# Allegro board ADUINO_UNO.brd
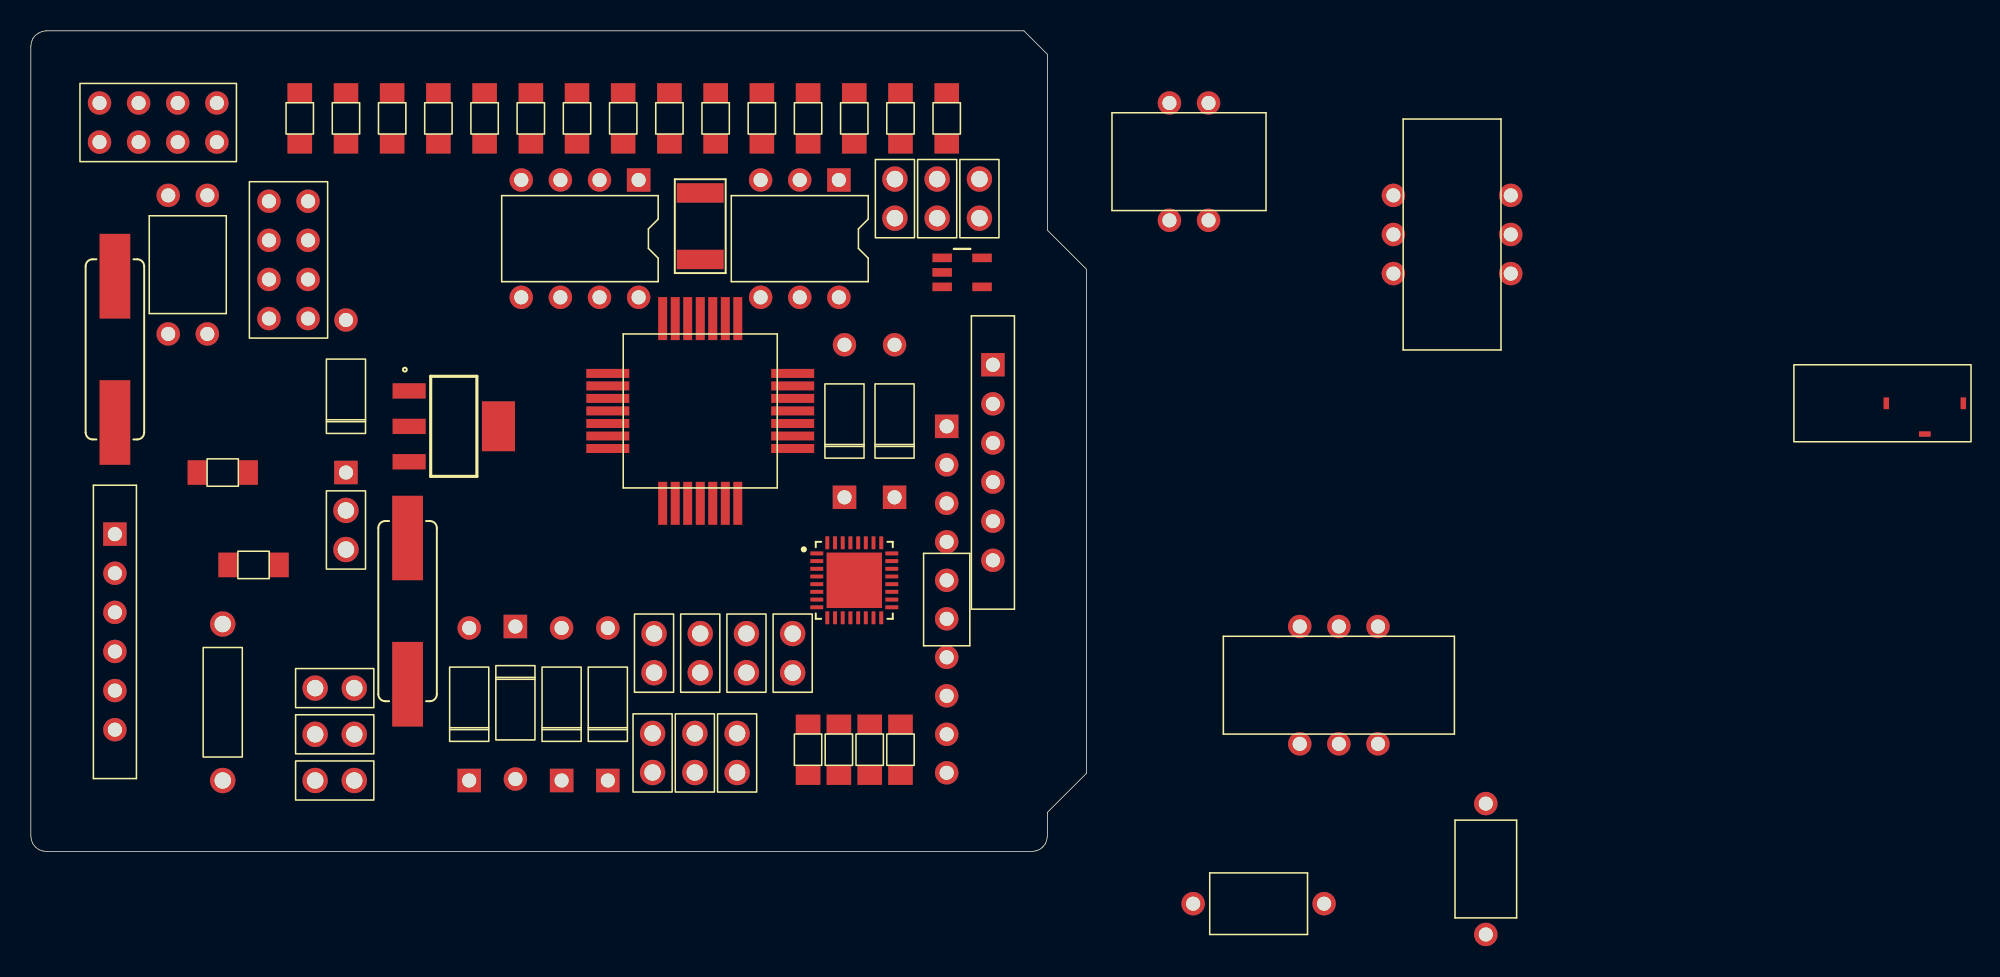
[diagram p0: board, top side]
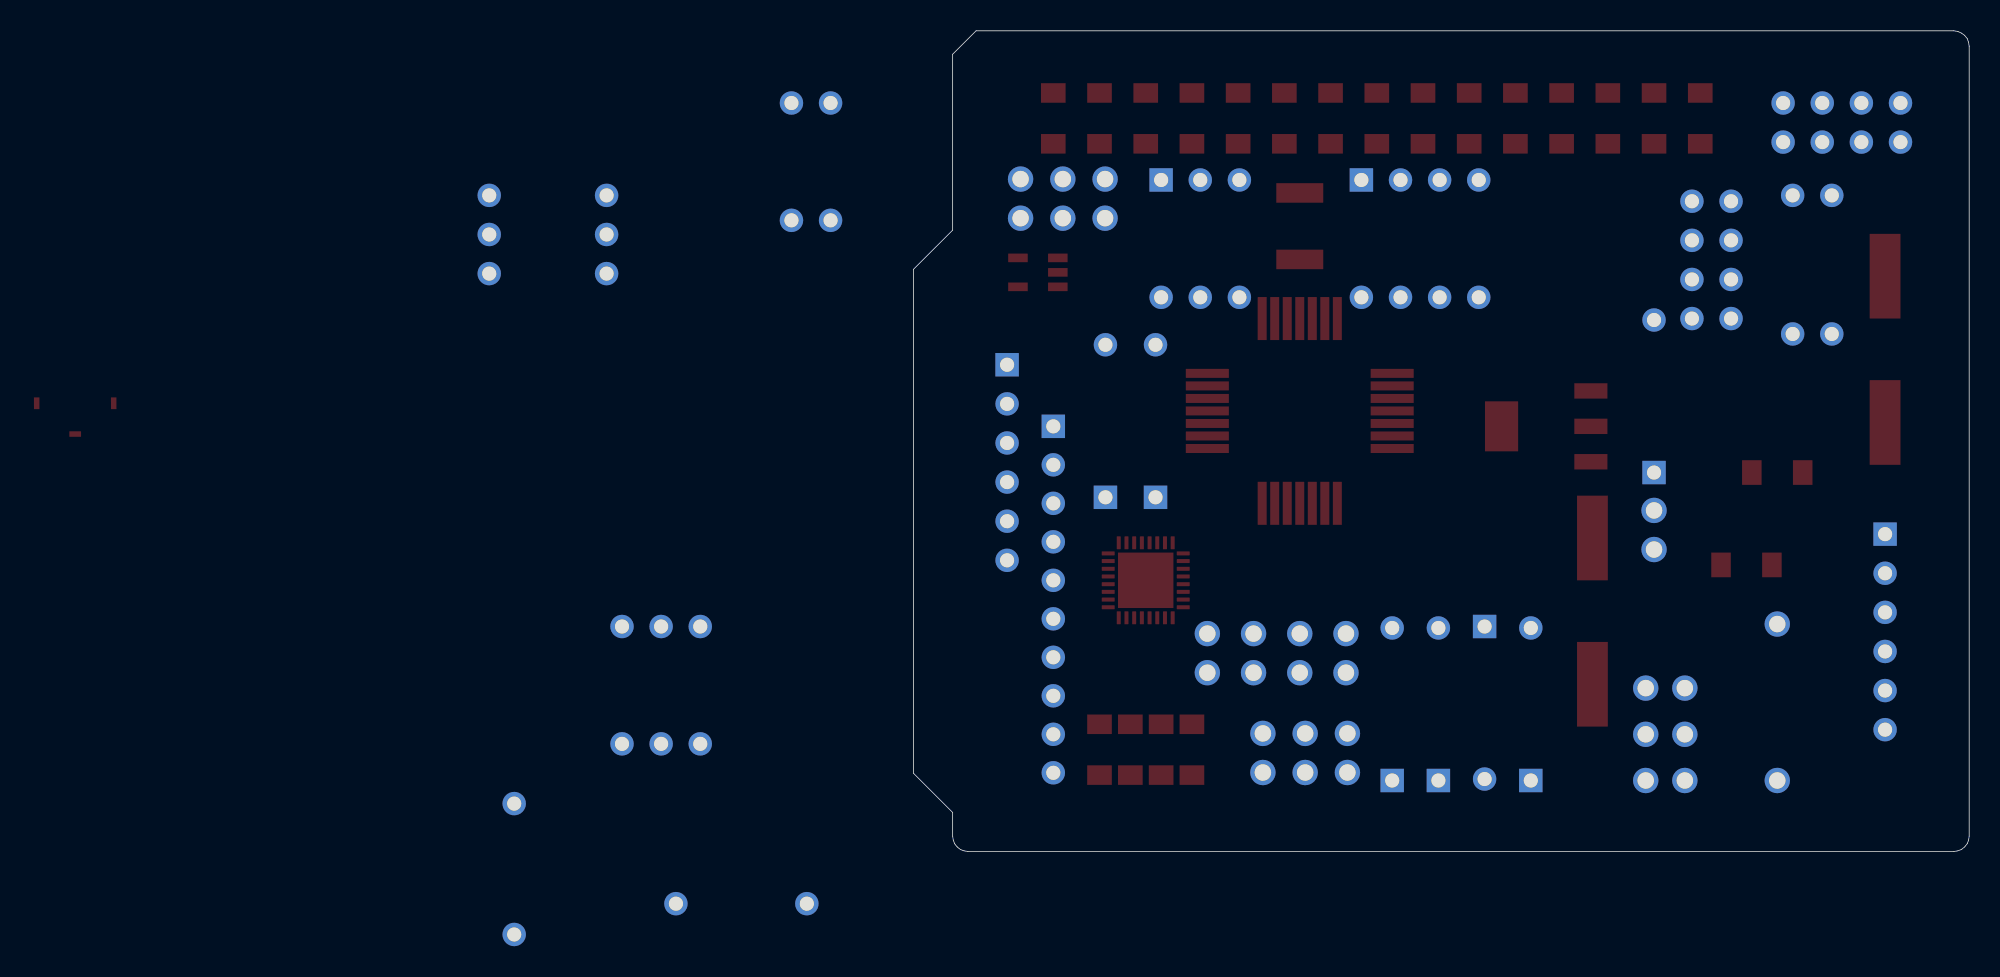
[diagram p1: board, bottom side, seen from below]

Outline 68.53 x 53.3 mm; copper layers: TOP, BOTTOM. Coordinates in mm from the lower left corner of the outline.
Outline path: 0,52.28 0,0.99 0.04,0.74 0.13,0.51 0.3,0.3 0.51,0.13 0.74,0.04 0.99,0 65,0 65.25,0.04 65.49,0.13 65.7,0.3 65.87,0.51 65.95,0.74 66,0.99 66,2.54 68.53,5.08 68.53,37.81 66,40.35 66,51.78 64.47,53.3 0.99,53.3 0.74,53.26 0.51,53.15 0.3,53 0.13,52.79 0.04,52.56 0,52.28

## Design rules (mm)
constraint set DEFAULT: min track width 0.127

## Placement (name value [footprint] x y rotation side)
C1  100n  [CAPCK05]  49.46 11.61 0 top
C2  100n  [CAPCK05]  58.84 41.13 0 top
C3  47u  [CAPCK05]  61.58 41.13 0 top
C4  47u  [CAPCK05]  56.1 41.13 0 top
C5  1u  [CAPCK05]  46.46 11.61 0 top
C6  100n  [CAPCK05]  45.85 5.13 0 top
C7  100n  [CAPCK05]  43.11 5.13 0 top
C8  22p  [CAPCK05]  43.46 11.61 0 top
C9  22p  [CAPCK05]  20.46 19.61 0 top
C10  22p  [CAPCK05]  40.37 5.13 0 top
C11  22p  [CAPCK05]  18.46 10.61 270 top
C12  100n  [CAPCK05]  40.46 11.61 0 top
C13  1u  [CAPCK05]  18.46 7.61 270 top
C14  100n  [CAPCK05]  18.46 4.61 270 top
D1  M7  [DO41]  37.46 4.61 0 top
D2  LED  [DO41]  34.46 4.61 0 top
D3  LED  [DO41]  28.46 4.61 0 top
D4  CD1206-S01575  [DO41]  31.46 14.61 180 top
D5  DIODE  [DO41]  20.46 24.61 0 top
D6  LED  [DO41]  52.82 23 0 top
D7  LED  [DO41]  56.08 23 0 top
F1  MF-MSMF050-2  [F1812]  43.46 40.61 270 top
IC1  ATmega16U2-MU<R>  [IC11]  43.46 34.61 0 top
IC2  ATmega8 - TQFP32  [QFN50P500X500X100-33N]  53.46 17.61 0 top
J1  8*1F-88.5  [JUMPER8]  4.46 48.61 270 top
J2  CON6A  [CON61]  87.46 14.61 270 top
J3  2*2 M- NM  [CON41]  76.46 48.61 270 top
J4  3*2 M  [CON61]  88.46 42.61 0 top
J5  10*1F-H8.5  [CON10]  59.46 27.61 0 top
J6  CON6  [JUMPER6]  5.46 20.61 0 top
J7  CON6  [JUMPER6]  62.46 31.61 0 top
J8  CON8  [JUMPER8]  15.46 34.61 0 top
L1  BLM21  [RES400]  12.46 4.61 0 top
P2  POWERSUPPLY_Y_DC21MMX  [POWER_SUPPLY_DC]  114.46 26.61 0 top
Q1  NDC7003P/SOT  [DIP6_3]  52.46 43.61 270 top
R1  10k  [SMDRES]  50.46 47.61 270 top
R2  1k  [SMDRES]  53.46 47.61 270 top
R3  10k  [SMDRES]  56.46 47.61 270 top
R4  100n  [SMDRES]  26.46 47.61 270 top
R5  1k  [SMDRES]  23.46 47.61 270 top
R6  10k  [SMDRES]  59.46 47.61 270 top
R7  1M  [SMDRES]  47.46 47.61 270 top
R8  22R  [SMDRES]  14.46 18.61 0 top
R9  22R  [SMDRES]  12.46 24.61 0 top
R10  1k  [SMDRES]  38.46 47.61 270 top
R11  1k  [SMDRES]  41.46 47.61 270 top
R12  1k  [SMDRES]  44.46 47.61 270 top
R13  1k  [SMDRES]  52.46 6.61 90 top
R14  1k  [SMDRES]  29.46 47.61 90 top
R15  R2  [SMDRES]  56.46 6.61 270 top
R16  R2  [SMDRES]  54.46 6.61 270 top
R*  -  [unnamed]  35.46 47.61 270 top
RN1B1  1M  [SMDRES]  20.46 47.61 270 top
RN1C1  10k  [SMDRES]  32.46 47.61 270 top
RV1  CG0603MLC-05E  [SMDRES]  17.46 47.61 270 top
RV2  CG0603MLC-05E  [SMDRES]  50.46 6.61 270 top
U3  NCP1117ST50T3G  [SOT230P700X180-4N]  26.46 27.61 0 top
U4  LP2957/TO  [SOT95P280X145-5N]  60.46 37.61 0 top
U11  SW PUSHBUTTON-SPST-2  [SW4]  11.46 42.61 270 top
U12  SW PUSHBUTTON  [SW2]  94.46 -5.39 90 top
U13  SW PUSHBUTTON  [SW2]  75.46 -3.39 0 top
U14  LMV358/SO  [DIP8_3]  39.46 43.61 270 top
Y1  16MHz  [XTAL_FOXSDLF160-20]  24.46 15.61 270 top
Y2  16MHZ  [XTAL_FOXSDLF160-20]  5.46 32.61 270 top

## Library data of the parts
C1 C2 C5-C14 = CAP NP: Tolerance: ***; User Part Number: ***
C3 C4 = CAP POL: Tolerance: ***; User Part Number: ***
D1 D4 D5 = DIODE
D2 D3 D6 D7 = LED
F1 = FUSE
IC1 = ATMega8-TQFP32_1
IC2 = ATMega8-TQFP32_0
J1 J8 = CON8: User Part Number: ***
J2 J4 = CON6A
J3 = CON4A
J5 = CON10
J6 J7 = CON6
L1 = BEAD: Tolerance: ***; User Part Number: ***
P2 = BA17805FP/TO_6
Q1 = NDC7003P/SOT: Tolerance: ***; User Part Number: ***
R1-R16 RN1B1 RN1C1 = R2: Tolerance: ***; User Part Number: ***
R* = -: Tolerance: ***; User Part Number: ***
RV1 RV2 = VARISTOR: Tolerance: ***; User Part Number: ***
U3 = BA17805FP/TO_3
U4 = LP2957/TO_0
U11 = SW PUSHBUTTON-SPST-2
U12 U13 = SW PUSHBUTTON
U14 = LMV358/SO: Tolerance: ***; User Part Number: ***
Y1 = ZTA
Y2 = CRYSTAL

## Footprints (pads in the part's own frame, mm; a bottom-side part is the same pattern mirrored in y, then rotated)
CAPCK05
  round 1.651 hole 1.067: 1(0,0) 2(0,2.54)
CON10
  rect 1.524x1.524 hole 0.914: 1(0,0)
  round 1.524 hole 0.914: 2(0,-2.5) 3(0,-5) 4(0,-7.5) 5(0,-10) 6(0,-12.5) 7(0,-15) 8(0,-17.5) 9(0,-20) 10(0,-22.5)
CON41
  round 1.524 hole 0.914: 1(0,0) 2(0,-2.54) 3(7.62,-2.54) 4(7.62,0)
CON61
  round 1.524 hole 0.914: 1(0,0) 2(0,-2.54) 3(0,-5.08) 4(7.62,-5.08) 5(7.62,-2.54) 6(7.62,0)
DIP6_3
  rect 1.524x1.524 hole 0.914: 1(0,0)
  round 1.524 hole 0.914: 2(0,-2.54) 3(0,-5.08) 4(7.62,-5.08) 5(7.62,-2.54) 6(7.62,0)
DIP8_3
  rect 1.524x1.524 hole 0.914: 1(0,0)
  round 1.524 hole 0.914: 2(0,-2.54) 3(0,-5.08) 4(0,-7.62) 5(7.62,-7.62) 6(7.62,-5.08) 7(7.62,-2.54) 8(7.62,0)
DO41
  rect 1.524x1.524 hole 0.914: 1(0,0)
  round 1.524 hole 0.914: 2(0,9.906)
F1812
  rect 1.27x3.048 smd: 1(-2.159,0) 2(2.159,0)
IC11
  rect 0.584x2.794 smd: 1(0,0) 2(-0.813,0) 3(-1.626,0) 4(-2.439,0) 12(-2.439,-12) 13(-1.626,-12) 14(-0.813,-12) 15(0,-12) 16(0.813,-12) 17(1.626,-12) 18(2.439,-12) 26(2.439,0) 27(1.626,0) 28(0.813,0)
  rect 2.794x0.584 smd: 5(-6,-3.561) 6(-6,-4.374) 7(-6,-5.187) 8(-6,-6) 9(-6,-6.813) 10(-6,-7.626) 11(-6,-8.439) 19(6,-8.439) 20(6,-7.626) 21(6,-6.813) 22(6,-6) 23(6,-5.187) 24(6,-4.374) 25(6,-3.561)
JUMPER6
  rect 1.524x1.524 hole 0.914: 1(0,0)
  round 1.524 hole 0.914: 2(0,-2.54) 3(0,-5.08) 4(0,-7.62) 5(0,-10.16) 6(0,-12.7)
JUMPER8
  round 1.524 hole 0.914: 1(0,0) 2(2.54,0) 3(0,2.54) 4(2.54,2.54) 5(0,5.08) 6(2.54,5.08) 7(0,7.62) 8(2.54,7.62)
POWER_SUPPLY_DC
  rect 0.762x0.356 smd rot 89.7: 1(11,2.5) 2(6,2.5)
  rect 0.762x0.356 smd: 3(8.5,0.5)
QFN50P500X500X100-33N
  custom 0.84x0.26 smd: 1(-2.435,1.75) 2(-2.435,1.25) 3(-2.435,0.75) 4(-2.435,0.25) 5(-2.435,-0.25) 6(-2.435,-0.75) 7(-2.435,-1.25) 8(-2.435,-1.75) 17(2.435,-1.75) 18(2.435,-1.25) 19(2.435,-0.75) 20(2.435,-0.25) 21(2.435,0.25) 22(2.435,0.75) 23(2.435,1.25) 24(2.435,1.75)
  custom 0.26x0.84 smd: 9(-1.75,-2.435) 10(-1.25,-2.435) 11(-0.75,-2.435) 12(-0.25,-2.435) 13(0.25,-2.435) 14(0.75,-2.435) 15(1.25,-2.435) 16(1.75,-2.435) 25(1.75,2.435) 26(1.25,2.435) 27(0.75,2.435) 28(0.25,2.435) 29(-0.25,2.435) 30(-0.75,2.435) 31(-1.25,2.435) 32(-1.75,2.435)
  rect 3.6x3.6 smd: 33(0,0)
RES400
  round 1.651 hole 1.067: 1(0,0) 2(0,10.16)
SMDRES
  rect 1.27x1.6 smd: 1(-1.651,0) 2(1.651,0)
SOT95P280X145-5N
  rect 1.27x0.559 smd: 1(-1.295,0.94) 2(-1.295,0) 3(-1.295,-0.94) 4(1.295,-0.94) 5(1.295,0.94)
SOT230P700X180-4N
  rect 2.15x1 smd: 1(-1.9,2.3) 2(-1.9,0) 3(-1.9,-2.3)
  rect 2.15x3.25 smd: 4(3.9,0)
SW2
  round 1.524 hole 0.914: 1(0,0) 2(8.5,0)
SW4
  round 1.524 hole 0.914: 1(0,0) 2(0,-2.54) 3(9,-2.54) 4(9,0)
unnamed
  rect 1.27x1.6 smd: 1(-1.651,0) 2(1.651,0)
XTAL_FOXSDLF160-20
  rect 5.5x2 smd: 1(-4.75,0) 2(4.75,0)

## Nets
+3V3: C5.1 J1.4 U4.5(OUT) U14.2
+5V: C1.1 C1.2 C2.1 C2.2 C3.2 C4.1 C4.2 C5.2 C6.1 C8.1 C9.1 C10.1 C11.1 C12.1 C12.2 C14.1 C14.2 D2.1(CATHODE) D2.2 D3.1(CATHODE) D4.1(K) D5.1(K) D7.2 IC1.2 IC1.3 IC1.7 IC1.8 IC1.20 IC1.22 IC2.3 IC2.4 IC2.9 IC2.32 IC2.33 J1.2 J1.5 J1.6 J1.7 J1.8 J2.2 J2.6 J4.2 J4.6 J5.7 J8.7 J8.8 P2.1 P2.3 Q1.4 R1.1 R1.2 R2.1 R2.2 R3.1 R3.2 R4.1 R5.1 R6.1 R10.2 R11.2 R12.1 R12.2 R13.1 R13.2 R14.2 R15.1 R15.2 R16.1 RN1C1.1 U3.1 U3.2 U3.4(OUT) U4.1 U4.2 U4.3 U11.1 U11.2 U13.2 U14.3 U14.4 U14.6 U14.7(OUTPUT) U14.8
5: D3.2 D6.2 IC2.8 R4.2 R5.2 R11.1 R14.1 R16.2
AD0: IC1.23 J7.1
AD1: IC1.24 J7.2
AD2: IC1.25 J7.3
AD3: IC1.26 J7.4
AD4/SDA: IC1.27 J5.9 J7.5
AD5/SCI: IC1.28 J5.10 J7.6
AREF: C6.2 IC1.21 J5.8
DTR: C7.1 IC2.13 R10.1
GATE_CMD: Q1.3 U14.1
IO2: IC1.4 J8.6
IO3: IC1.5 J8.5
IO4: IC1.6 J8.4
IO5: IC1.11 J8.3
IO6: IC1.12 J8.2
IO7: IC1.13 J8.1
IO8: IC1.14 J5.1
IO9: IC1.15 J5.2
MISO: IC1.18 J4.1 J5.5
MISO2: IC2.17 J2.1
MOSI: IC1.17 J4.4 J5.4
MOSI2: IC2.16 J2.4
PB4: IC2.18 J3.1
PB5: IC2.19 J3.3
PB6: IC2.20 J3.2
PB7: IC2.21 J3.4
PWRIN: D1.2 P2.2
RD+: IC2.29 R9.2
RD-: IC2.30 R8.2
RESET2: D4.2 IC2.24 J2.5 RN1C1.2
RXLED: D7.1(CATHODE) IC2.10
SCK: IC1.19 J4.3 J5.6 U14.5
SCK2: IC2.15 J2.3
SS: IC1.16 J5.3
TP_VUCAP: C13.1 IC2.27
TXLED: D6.1(CATHODE) IC2.11
UGND: C13.2 IC2.28 J6.4 L1.1 U13.1
USBVCC: F1.2 IC2.31 Q1.2
USHIELD: J6.5 J6.6 L1.2 RV1.2 RV2.2
XT1: C11.2 IC2.1 RN1B1.2 Y1.1
XT2: C9.2 IC2.2(XTAL2(PC0)) RN1B1.1 Y1.2
XUSB: F1.1 J6.1
N03886: J6.2 R8.1 RV2.1
N03915: J6.3 R9.1 RV1.1
N09857: C10.2 IC1.9 R7.2 Y2.1
N09861: C8.2 IC1.10(XTAL2) R7.1 Y2.2
N10307: C7.2 D5.2 IC1.1 J1.3 J4.5 R6.2 U11.3 U11.4 U12.1 U12.2
N20628: C3.1 D1.1(K) U3.3

Pads without a net: IC2 5 6 7 12 14 22 23 25 26; J1 1; Q1 1 5 6; R* 1 2; U4 4

## Text on the board
PAGE_OUTLINE: 53.3000
